# Altium PCB Battery_guage.PcbDoc
Units mil, origin at the board's own origin, x right, y up, seen from the top; angles counter-clockwise.
Board outline 3375 x 1835 mil, 2 copper layers (Top Layer, Bottom Layer); 41 components, 32 nets, 143 pads, 25 vias.
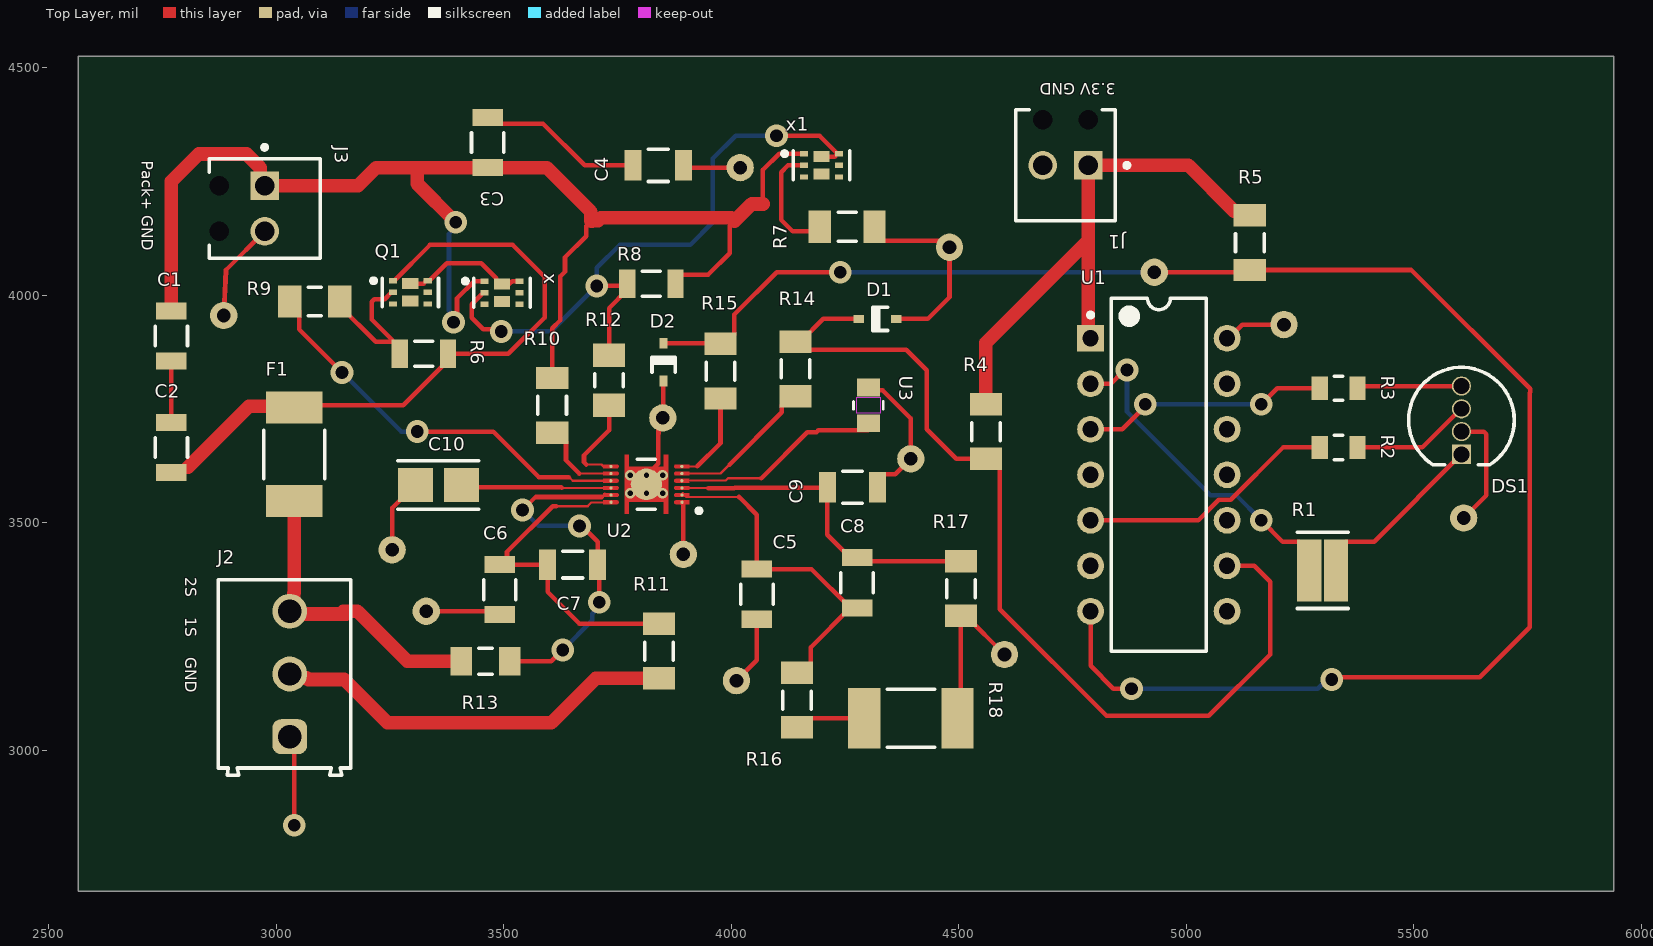
[diagram p0: Top Layer view]
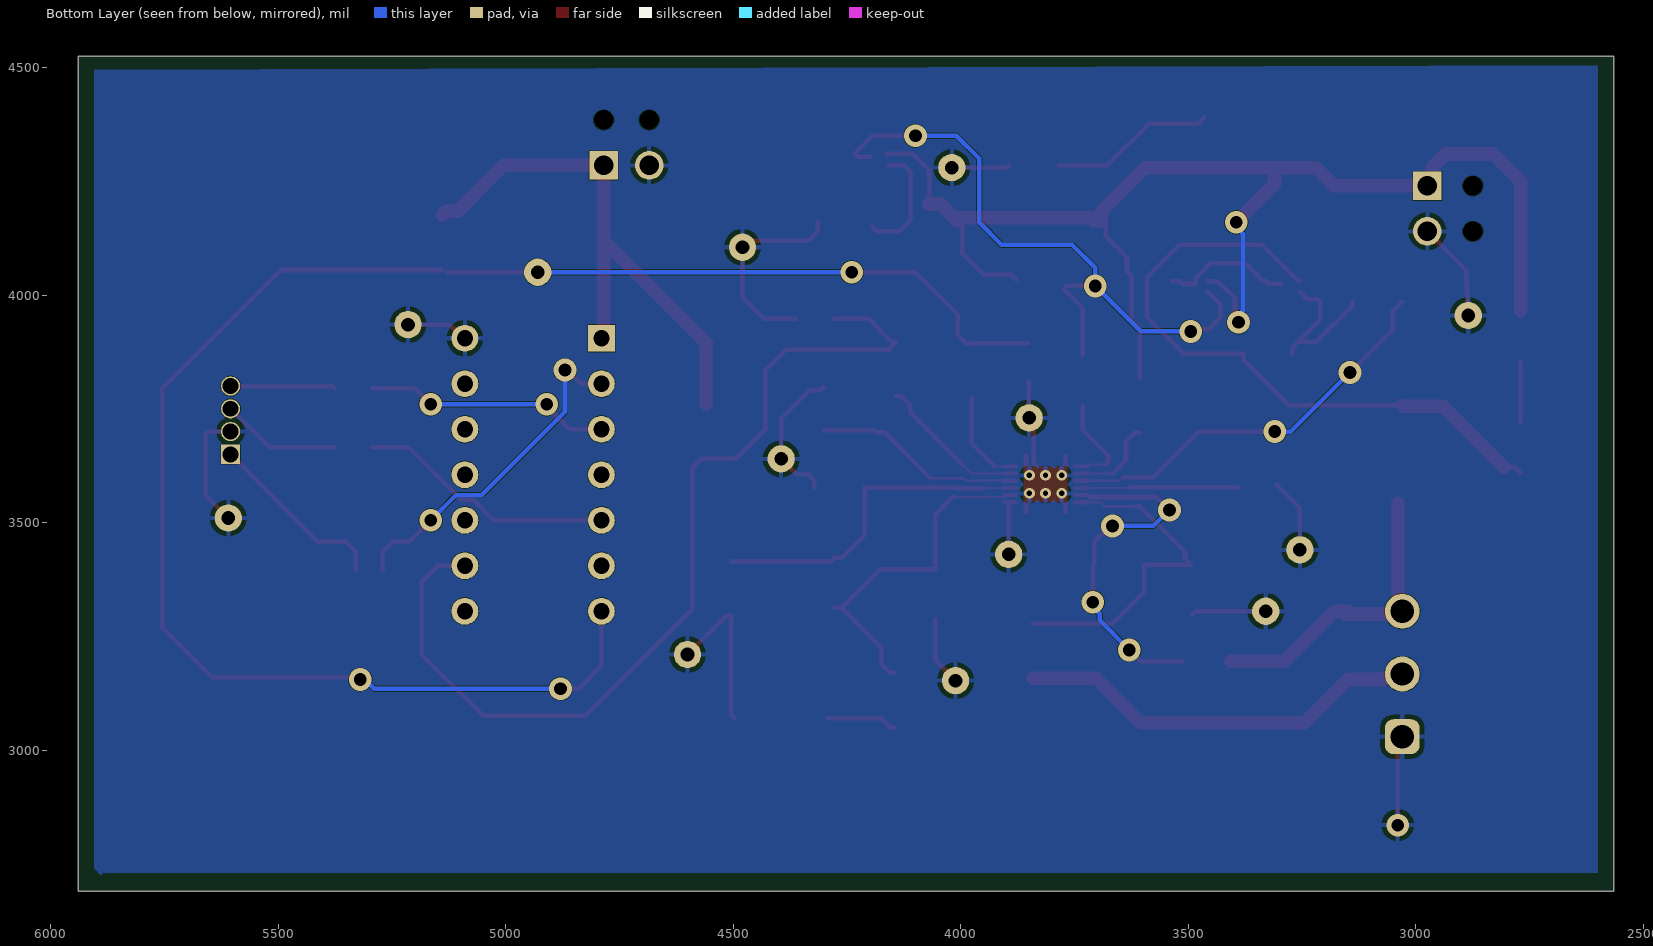
[diagram p1: Bottom Layer view, seen from below]
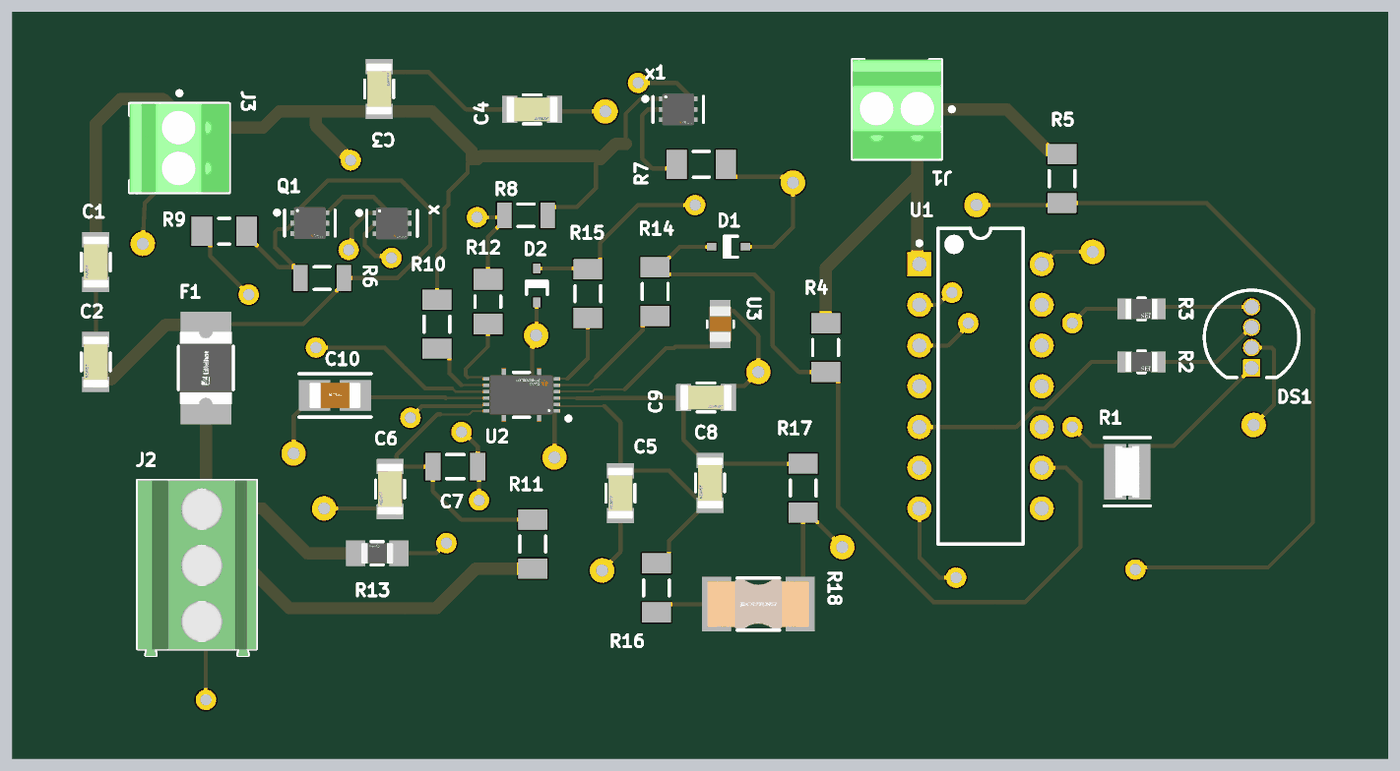
[diagram p2: 3D render of the assembled board from above, using the file's embedded part models]

## Layer stack, top to bottom
Top Solder: solder mask 0.4, Solder Resist, Dk 3.5
Top Layer: signal copper 1.4
Dielectric 1: dielectric 12.6, FR-4, Dk 4.8
Bottom Layer: signal copper 1.4
Bottom Solder: solder mask 0.4, Solder Resist, Dk 3.5

## Board outline
2565,2690 2565,4525 5940,4525 5940,2690

## Design rules (kind name [scope] priority, off if disabled: settings)
Clearance [All] p1: gap=1 ignorepadtopadclearanceinfootprint=FALSE
MinimumSolderMaskSliver [All] p1: minsoldermaskwidth=2
PolygonConnect [All] p1: connectstyle=Relief reliefconductorwidth=10 reliefentries=4 polygonreliefangle="90 Angle" airgapwidth=10
RoutingVias [All] p1: holewidth=28 width=50 viastyle="Through Hole" minholewidth=28 minwidth=50 maxholewidth=28 maxwidth=50
SolderMaskExpansion [All] p1: expansion=4 istentingtop=FALSE
SupplyNets "Schematic Supply Nets_1" [InNet('3.3V')] p1: voltage=0.000
SupplyNets "Schematic Supply Nets" [InNet('GND')] p2: voltage=0.000
Width [All] p1: maxlimit=35 minlimit=3 preferedwidth=10
29 further rules are at their usual default settings.

## Components (designator, comment, footprint, x,y, rotation, side; value= is the part's Value field where it differs from the comment)
C1 "C1206C104KARACTU" FP-C1206C-EB-MFG 2770,3910 r90 top value="0.10 μF"
C2 "C1206C104KARACTU" FP-C1206C-EB-MFG 2770,3664.88 r90 top value="0.10 μF"
C3 "C1206C104KARACTU" FP-C1206C-EB-MFG 3465,4335.12 r270 top value="0.10 μF"
C4 "C1206C104KARACTU" FP-C1206C-EB-MFG 3840,4285 r180 top value="0.10 μF"
C5 "C1206C104KARACTU" FP-C1206C-EB-MFG 4056.73,3342.6 r90 top value="0.10 μF"
C6 "C1206C104KARACTU" FP-C1206C-EB-MFG 3491.73,3352.6 r90 top value="0.10 μF"
C7 "CAP 1uF 10V 1206(3216)" CAPC1206(3216)130_L 3651.73,3407.6 r180 top value=1uF
C8 "C1206C104KARACTU" FP-C1206C-EB-MFG 4276.73,3367.6 r90 top value="0.10 μF"
C9 "C1206C104KARACTU" FP-C1206C-EB-MFG 4266.73,3577.6 r180 top value="0.10 μF"
C10 "C3216X7R1H225K160AB" FP-C3216-160-0_2-IPC_A 3356.73,3582.6 r0 top
D1 "BZT52C5V6S-7-F" DIOD-SOD323-2_V 4321.73,3947.6 r180 top
D2 "BZT52C5V6S-7-F" DIOD-SOD323-2_V 3851.73,3852.6 r90 top
DS1 "WP154A4SUREQBFZGC" KING-WP154A4SUREQBFZGC_V 5605,3725 r180 top
F1 "1812L075/33DR" FP-1812L075-33DR-MFG 3040,3650 r90 top
J1 "1725656" PHOE-1725656-2 4735,4285 r180 top
J2 "691214110003" 691214110003 3018.19,3167.2 r90 top
J3 "1725656" PHOE-1725656-2 2975,4190 r270 top
Q1 "CSD87502Q2" FP-DQK0006B-MFG 3295,4005.79 r0 top
R1 "LTR18EZPF1500" FP-LTR18-IPC_A 5300,3395 r0 top
R2 "RMCF0805JT47R0" FP-RMCF0805-MFG 5335,3665 r0 top
R3 "RMCF0805JT47R0" FP-RMCF0805-MFG 5335,3795 r0 top
R4 "RC1206FR-0710KL" RESC3116X65X40ML10T20 4560,3700 r90 top
R5 "RC1206FR-0710KL" RESC3116X65X40ML10T20 5140,4115 r270 top
R6 "CRCW120610M0JNEA" RESC3216X60X45LL10T20 3325,3870.63 r0 top
R7 "RC1206FR-0710KL" RESC3116X65X40ML10T20 4255,4150 r180 top
R8 "CRCW120610M0JNEA" RESC3216X60X45LL10T20 3825,4025 r0 top
R9 "RG3216P-5101-B-T1" RESC3216X50X50NL20T25 3085,3985.63 r0 top
R10 "RC1206FR-0710RL" RESC3116X65X40ML10T20 3606.73,3757.6 r90 top
R11 "RC1206FR-07100RL" RESC3116X65X40ML10T20 3841.73,3217.6 r90 top
R12 "RG3216P-5101-B-T1" RESC3216X50X50NL20T25 3731.73,3812.6 r90 top
R13 "RLT1220-F-5R00-FNH" FP-RLT1220-F-MFG 3460,3195 r180 top
R14 "RC1206FR-07100RL" RESC3116X65X40ML10T20 4141.73,3837.6 r270 top
R15 "RC1206FR-07100RL" RESC3116X65X40ML10T20 3976.73,3832.6 r270 top
R16 "RC1206FR-07100RL" RESC3116X65X40ML10T20 4145,3110 r90 top
R17 "RC1206FR-07100RL" RESC3116X65X40ML10T20 4505,3355 r90 top
R18 "CSS2H-2512K-3L00F" FP-CSS2H-2512K-3L00F-MFG 4395,3070 r0 top
U1 "ATtiny44-20PU" 14P3 4940,3605 r0 top
U2 "BQ28Z610DRZR" FP-DRZ0012A-MFG 3813.98,3583.98 r90 top
U3 "NTCS0805E3103FHT" NTCS0805_VIS 4301.73,3757.6 r270 top
x "CSD87502Q2" FP-DQK0006B-MFG 3496.61,4005 r0 top
x1 "CSD87502Q2" FP-DQK0006B-MFG 4198.39,4285 r0 top

## Footprints (in the part's own frame and the unit in brackets; to place one, negate y for a bottom-side part, rotate by r counter-clockwise, add the part's x,y. Pads: shape width x height; smd on the part's side, far side on the other; paste and mask are expansions set on the pad)
14P3 [mm] "DIP, 14-Pin, Row Spacing 7.62 mm, Pitch 2.54 mm"
  rect 1.5x1.5 hole 0.9: 1(-3.81,7.62)
  round 1.5 hole 0.9: 2(-3.81,5.08) 3(-3.81,2.54) 4(-3.81,0) 5(-3.81,-2.54) 6(-3.81,-5.08) 7(-3.81,-7.62) 8(3.81,-7.62) 9(3.81,-5.08) 10(3.81,-2.54) 11(3.81,0) 12(3.81,2.54) 13(3.81,5.08) 14(3.81,7.62)
  silkscreen extent -3.93,-9.85 2.65,9.85, body extent -3.55,-9.85 3.55,9.85, height 5.33
691214110003 [mm] "3.50 mm Horizontal Entry Modular, 3p"
  rrect50% 1.95x1.95 hole 1.3: 1(-3.5,-0.3)
  round 1.95 hole 1.3: 2(0,-0.3) 3(3.5,-0.3)
  silkscreen extent -5.65,-3.7 5.25,3.7, body extent -5.7,-3.7 5.25,3.7, height 8.55
CAPC1206(3216)130_L [mm] "Chip Capacitor, Body 3.2x1.6mm, Height 1.3mm, IPC High Density"
  rect 0.95x1.7 smd: 1(-1.4,0) 2(1.4,0)
  silkscreen extent -0.55,-0.75 0.55,0.75, body extent -1.7,-0.9 1.7,0.9, height 1.3
DIOD-SOD323-2_V [mm] "SOD-323, 2-Leads, Body 1.7x1.3mm, Lead Span 2.5mm"
  rect 0.59x0.45 smd: 1(-1.055,0) 2(1.055,0)
  silkscreen extent -0.56,-0.65 0.26,0.65, body extent -0.85,-0.65 0.85,0.65, height 1.2
FP-1812L075-33DR-MFG [mm]
  rect 1.78x3.15 smd paste+0 mask+0: 1(-2.615,0) 2(2.615,0)
  silkscreen extent -1.35,-1.71 1.35,1.71, body extent -3.6,-1.81 3.6,1.81, height 0.25
FP-C1206C-EB-MFG [mm]
  rect 0.95x1.7 smd paste+0 mask+0: 1(-1.4,0) 2(1.4,0)
  silkscreen extent -0.55,-0.9 0.55,0.9, body extent -2,-1 2,1, height 0.25
FP-C3216-160-0_2-IPC_A [mil]
  rect 76.93x75.05 smd paste+0 mask+0: 1(-50.24,0) 2(50.24,0)
  silkscreen extent -89,-53 89,53, body extent -108,-57 108,57, height 10
FP-CSS2H-2512K-3L00F-MFG [mm]
  rect 1.8x3.4 smd paste+0 mask+0: 1(-2.6,0) 2(2.6,0)
  silkscreen extent -1.33,-1.63 1.33,1.63, body extent -3.6,-1.8 3.6,1.8, height 0.25
FP-DQK0006B-MFG [mm]
  rect 0.45x0.3 smd paste+0 mask+0: 1(-0.975,0.65) 2(-0.975,0) 3(-0.975,-0.65) 4(0.975,-0.65) 5(0.975,0) 6(0.975,0.65)
  rect 0.9x0.625 smd paste-1000 mask+0: 7(0,0.488) 8(0,-0.488)
  silkscreen extent -2.17,-0.8 1.58,0.8, body extent -1.3,-1.15 1.3,1.15, height 0.25
FP-DRZ0012A-MFG [mm]
  round 0.18 smd paste-1000 mask+0: 1(-1,-1.985) 2(-0.6,-1.985) 3(-0.2,-1.985) 4(0.2,-1.975) 5(0.6,-1.975) 6(1,-1.975) 7(1,1.985) 8(0.6,1.985) 9(0.2,1.985) 10(-0.2,1.975) 11(-0.6,1.975) 12(-1,1.975)
  round 1.755 smd paste-1000 mask+0: 13(0,0)
  Top Layer region: -1.65,1.225 1.65,1.225 1.65,0.975 0.975,0.975 0.975,-0.975 1.65,-0.975 1.65,-1.225 -1.65,-1.225 -1.65,-0.975 -0.975,-0.975 -0.975,0.975 -1.65,0.975 -1.65,1.225
  Top Layer region: -0.7,-2.4 -0.7,-1.65 -0.692,-1.612 -0.671,-1.579 -0.638,-1.558 -0.6,-1.55 -0.6,-1.55 -0.562,-1.558 -0.529,-1.579 -0.508,-1.612 -0.5,-1.65 -0.5,-1.65 -0.5,-2.4
  Top Layer region: -0.3,-2.4 -0.3,-1.65 -0.292,-1.612 -0.271,-1.579 -0.238,-1.558 -0.2,-1.55 -0.2,-1.55 -0.162,-1.558 -0.129,-1.579 -0.108,-1.612 -0.1,-1.65 -0.1,-1.65 -0.1,-2.4
  Top Layer region: 0.1,-2.4 0.1,-1.65 0.108,-1.612 0.129,-1.579 0.162,-1.558 0.2,-1.55 0.2,-1.55 0.238,-1.558 0.271,-1.579 0.292,-1.612 0.3,-1.65 0.3,-1.65 0.3,-2.4
  Top Layer region: 0.5,-2.4 0.5,-1.65 0.508,-1.612 0.529,-1.579 0.562,-1.558 0.6,-1.55 0.6,-1.55 0.638,-1.558 0.671,-1.579 0.692,-1.612 0.7,-1.65 0.7,-1.65 0.7,-2.4
  Top Layer region: 0.9,-2.4 0.9,-1.65 0.908,-1.612 0.929,-1.579 0.962,-1.558 1,-1.55 1,-1.55 1.038,-1.558 1.071,-1.579 1.092,-1.612 1.1,-1.65 1.1,-1.65 1.1,-2.4
  Top Layer region: 1.1,2.4 1.1,1.65 1.087,1.6 1.05,1.563 1,1.55 1,1.55 0.962,1.558 0.929,1.579 0.908,1.612 0.9,1.65 0.9,1.65 0.9,2.4
  Top Layer region: 0.7,2.4 0.7,1.65 0.687,1.6 0.65,1.563 0.6,1.55 0.6,1.55 0.562,1.558 0.529,1.579 0.508,1.612 0.5,1.65 0.5,1.65 0.5,2.4
  Top Layer region: 0.3,2.4 0.3,1.65 0.287,1.6 0.25,1.563 0.2,1.55 0.2,1.55 0.162,1.558 0.129,1.579 0.108,1.612 0.1,1.65 0.1,1.65 0.1,2.4
  Top Layer region: -0.1,2.4 -0.1,1.65 -0.113,1.6 -0.15,1.563 -0.2,1.55 -0.2,1.55 -0.238,1.558 -0.271,1.579 -0.292,1.612 -0.3,1.65 -0.3,1.65 -0.3,2.4
  Top Layer region: -0.5,2.4 -0.5,1.65 -0.513,1.6 -0.55,1.563 -0.6,1.55 -0.6,1.55 -0.638,1.558 -0.671,1.579 -0.692,1.612 -0.7,1.65 -0.7,1.65 -0.7,2.4
  Top Layer region: -0.9,2.4 -0.9,1.65 -0.913,1.6 -0.95,1.563 -1,1.55 -1,1.55 -1.038,1.558 -1.071,1.579 -1.092,1.612 -1.1,1.65 -1.1,1.65 -1.1,2.4
  Top Layer region: -1.1,-2.4 -1.1,-1.65 -1.092,-1.612 -1.071,-1.579 -1.038,-1.558 -1,-1.55 -1,-1.55 -0.962,-1.558 -0.929,-1.579 -0.908,-1.612 -0.9,-1.65 -0.9,-1.65 -0.9,-2.4
  silkscreen extent -1.6,-3.05 1.4,0.5, body extent -1.75,-2.5 1.75,2.5, height 0.25
FP-LTR18-IPC_A [mil]
  rect 53.31x136.15 smd paste+0 mask+0: 1(-29.61,0) 2(29.61,0)
  silkscreen extent -56,-84 56,84, body extent -76,-88 76,88, height 10
FP-RLT1220-F-MFG [mm]
  rect 1.2x1.6 smd paste+0 mask+0: 1(-1.35,0) 2(1.35,0)
  silkscreen extent -0.38,-0.72 0.38,0.72, body extent -2.05,-0.9 2.05,0.9, height 0.25
FP-RMCF0805-MFG [mm]
  rect 0.9x1.3 smd paste+0 mask+0: 1(-1.05,0) 2(1.05,0)
  silkscreen extent -0.23,-0.67 0.23,0.67, body extent -1.6,-0.77 1.6,0.77, height 0.25
KING-WP154A4SUREQBFZGC_V [mm] "THD, 4-Leads, Dia 5.9mm, Pitch 1.27mm"
  rect 1.07x1.07 hole 0.889 paste-2539.97: 1(0,1.905)
  round 1.07 hole 0.889 paste-2539.97: 2(0,0.635) 3(0,-0.635) 4(0,-1.905)
  silkscreen extent -2.95,-2.95 2.95,2.5
NTCS0805_VIS [mm]
  rect 1x1.3 smd paste+0 mask+0: 1(-1,0) 2(1,0)
  Top Layer keep-out region: -0.449,-0.648 -0.449,0.648 0.449,0.648 0.449,-0.648
  silkscreen extent -0.22,-0.83 0.22,0.83, body extent -1.1,-0.7 1.1,0.7, height 0.94
PHOE-1725656-2 [mm] "Connector, 2-Leads, Body 6.2x5.4mm, Pitch 2.54mm"
  rect 1.6x1.6 hole 1.1: 1(-1.27,0)
  round 1.6 hole 1.1: 2(1.27,0)
  round 0 hole 1.1 unplated: MH1(-1.27,-2.54) MH2(1.27,-2.54)
  silkscreen extent -3.55,-3.1 2.77,3.1, body extent -2.77,-3.1 2.77,3.1, height 9
RESC3116X65X40ML10T20 [mm] "Chip Resistor, 2-Leads, Body 3.10x1.60mm, IPC Low Density"
  rect 1.25x1.8 smd: 1(-1.525,0) 2(1.525,0)
  silkscreen extent -0.5,-0.8 0.5,0.8, body extent -1.6,-0.85 1.6,0.85, height 0.65
RESC3216X50X50NL20T25 [mm] "Chip Resistor, 2-Leads, Body 3.20x1.60mm, IPC Medium Density"
  rect 1.3x1.8 smd: 1(-1.4,0) 2(1.4,0)
  silkscreen extent -0.35,-0.8 0.35,0.8, body extent -1.7,-0.9 1.7,0.9, height 0.5
RESC3216X60X45LL10T20 [mm] "Chip Resistor, 2-Leads, Body 3.20x1.60mm, IPC High Density"
  rect 0.9x1.6 smd: 1(-1.35,0) 2(1.35,0)
  silkscreen extent -0.5,-0.7 0.5,0.7, body extent -1.65,-0.85 1.65,0.85, height 0.6

## Part data
C1 C2 C3 C4 C5 C6 C8 C9: library part CMP-1037-04229-2, "CAP CER 0.1UF 250V X7R 1206", Capacitance="0.10 μF", Manufacturer=KEMET, Package=C1206C-EB, Temperature="-55°C to +150°C", Temperature Characteristic=X7R, Temperature Coefficient=15%, Temperature Range High=+150°C, Temperature Range Low=-55°C, Tolerance=0.1, Voltage Rating="250 V", Automotive=Yes, Automotive Grade="Grade 0", Category=Cap, ComponentLink2Description=Datasheet, ComponentLink2URL=https://content.kemet.com/datasheets/KEM_C1007_X8R_ULTRA_150C_SMD.pdf, Device Class L1="Passive Components", Device Class L2=Capacitors, Device Class L3="Ceramic Capacitors", Digikey Description="CAP CER 0.1UF 250V X7R 1206", Height=0.88mm, Ipc Land Pattern Name=CAPC320160X78, Lead Free=Yes, Manufacturer Part Number=C1206C104KARACTU, Material=Ceramic, Mouser Description="Multilayer Ceramic Capacitors MLCC - SMD/SMT 250volts 0.1uF X7R 10%", Octopart=https://octopart.com/c1206c104karactu-kemet-193627, RoHS=TRUE
C7: library part CMP-1037-04676-1, "CAP 1uF 10V ±20% 1206 (3216 Metric) Thickness 1.3mm SMD", Case-EIA=1206, Case-Metric=3216, Rated Voltage="10 V", Tolerance=Â±20%, Max Thickness="1.3 mm", Technology=SMT
C10: library part CMP-08246-002981-1, "Multilayer Ceramic Capacitors 2.2uF ±10% 50V X7R SMD 1206", Capacitance=2.2uF, Case Code (Imperial)=1206, Case Code (Metric)=3216, Dielectric=X7R, Dielectric Material=Ceramic, Max Operating Temperature=125°C, Min Operating Temperature=-55°C, Package Quantity=1, Tolerance=10%, Voltage Rating=50V, Case/Package=1206, Construction=Flat, Depth=1.6mm, Height=1.6mm, Lead Free="Lead Free", Length=3.2mm, Mount="Surface Mount", Number of Pins=2, Packaging="Tape and Reel", Resistor Type=Ceramic, RoHS Compliant=Yes, Series=C, Termination=SMD/SMT, Thickness=0.075inch, Voltage Rating (DC)=50V, Weight=0.000571oz, Width=0.063inch
D1 D2: library part CMP-2000-05977-1, "Surface Mount Zener Diode, 5.6 V, -65 to 150 degC, 2-Pin SOD323, RoHS, Tape and Reel", Ir - Reverse Current=3uA, Manufacturer=DiodesIncorporated, Maximum Operating Temperature=+150C, Minimum Operating Temperature=-65C, Package / Case=SOD-323, Package Description="2-Pin Surface Mount Device, Body 1.7 x 1.3 mm", Package Reference=SOD323-2, Pd - Power Dissipation=200mW, Voltage Temperature Coefficient=0.25mV/C, Voltage Tolerance=5%, Vz - Zener Voltage=5.6V, Zener Current=5mA, Brand=DiodesIncorporated, Configuration=Single, Datasheet URL=http://www.diodes.com/_files/datasheets/ds30093.pdf, Datasheet Version="Rev. 18-2, 05/2012", Factory Pack Quantity=3000, Height=1mm, Length=1.8mm, Manufacturer URL=http://www.diodes.com/, Mounting Style=SMD/SMT, Mounting Technology=SurfaceMount, Package URL=http://www.vishay.com/docs/71192/71192.pdf, Packaging=Reel, Product Category=ZenerDiodes, RoHS=True, Series=BZT52C5V6, Termination Style=SMD/SMT, Unit Weight=0.000173oz, Width=1.4mm, Zz - Zener Impedance=40Ohms
DS1: library part CMP-2000-07415-1, "Full Color LED Lamp, Dominant Wavelength RGB 630 / 525 / 465 nm, -40 to 85 degC, 4-Pin THD, RoHS", Color=Red,Green,Blue(RGB), Current - Test=20mA, Manufacturer=Kingbright, Millicandela Rating=1300mcdRed,1700mcdGreen,900mcdBlue, Package / Case=Radial-4Leads, Package Description="4-Pin Through Hole LED, Dia 5.9 mm, Pitch 1.27 mm", Standard Package=500, Voltage - Forward (Vf) (Typ)=1.9VRed,3.3VGreen,3.3VBlue, 3D Model="WP154A4SUREQBFZGW.sldprt /  / WP154A4SUREQBFZGW.pro /  / WP154A4SUREQBFZGW.igs /  / WP154A4SUREQBFZGW.stp", Category=Optoelectronics, Datasheet URL=https://www.kingbrightusa.com/images/catalog/spec/WP154A4SUREQBFZGC.pdf, Datasheet Version="Rev. 5A, 08/2014", Family=LEDIndication-Discrete, Height=8.60mm, Lens Style/Size=RoundwithDomedTop,5mm,T-13/4, Lens Type=Clear, Manufacturer URL=http://www.kingbright.com/, Mounting Technology=ThroughHole, Mounting Type=ThroughHole, Online Catalog=5mm,T-13/4(RGB)RoundwithDomedTopLEDLamp, Other Names="754-1615 / WP154A4SUREQBFZGC-ND", Package Reference=WP154A4SUREQBFZGC, Packaging=Bulk, Viewing Angle=50°, Wavelength - Dominant=630nm,525nm,465nm, Wavelength - Peak=645nm,515nm,460nm
F1: library part CMP-08606-000075-1, "PTC RESET FUSE 33V 750MA 1812", Case Code (Imperial)=1812, Case Code (Metric)=4532, Current Rating=20A, Hold Current=750mA, Max Operating Temperature=85°C, Max Power Dissipation=800mW, Min Operating Temperature=-40°C, Operating Supply Voltage=33V, Package Quantity=1500, Resistance=400mR, Trip Current=1.5A, Approvals=TUV, Case/Package=1812, Height=1.55mm, Lead Free="Lead Free", Length=4.73mm, Max Current Rating=20A, Mount="Surface Mount", Packaging="Tape and Reel", Power Dissipation=800mW, REACH SVHC="No SVHC", RoHS Compliant=Yes, Series=1812L, Terminal Material=Copper, Termination=SMD/SMT, Time to Trip=200ms, Voltage Rating=33V, Voltage Rating (DC)=33V, Width=3.41mm, Working Voltage=33V
J1 J3: library part CMP-2000-05299-1, "Male Header, Pitch 2.54 mm, 1 x 2 Position, Height 9 mm, Tail Length 3.5 mm", Colour=Green, Manufacturer="Phoenix Contact", Content=250pc(s), Datasheet URL=http://datasheet.octopart.com/1725656-Phoenix-Contact-datasheet-5302866.pdf, Datasheet Version=Apr-08, Industrial packaging=Yes, Manufacturer part No.=1725656, Manufacturer URL=http://www.phoenixcontact.com/, Number of contacts=2, Pitch=2.54mm, Type=MPT0,5/2-2,54
J2: library part CMP-1502-02466-2, Color="Blue, Green", Current=10A, Max Operating Temperature=105°C, Min Operating Temperature=-40°C, Voltage=300V, Contact Material=Brass, Contact Plating="Brass, Tin", Current Rating=10A, Height=12.2mm, Housing Material=Nylon, Lead Pitch=3.5mm, Length=7.4mm, Mount="Through Hole", NexarPartId=18818289, Number of contacts=3, Number of Levels=1, Number of Pins=3, Number of Positions Per Level=3, Packaging=Box, Pitch=3.5052mm, Plating="Brass, Steel", REACH SVHC=Unknown, RoHS=Compliant, Stripping Length=-6mm, Termination=Screw, Voltage Rating=300V, Width=10.9mm, Wire Gauge (Max)=24AWG, Wire Gauge (Min)=16AWG, Wire/Cable Gauge=24AWG
Q1 x x1: library part CMP-04962-000076-1, "MOSFET 2N-CH 30V 5A 6WSON", Continuous Drain Current (ID)=5A, Drain to Source Voltage (Vdss)=30V, Input Capacitance=353pF, Max Operating Temperature=150°C, Max Power Dissipation=2.3W, Min Operating Temperature=-55°C, Element Configuration=Dual, FET Type="2 N-Channel", Lead Free="Lead Free", Mount="Surface Mount", Packaging="Tape and Reel", Rds On Max=32.4mR, RoHS Compliant=Yes
R1: library part CMP-08839-001220-1, "High power chip resistors wide terminal type 150Ω 1% 0.75W 0612", Case Code (Imperial)=1206, Case Code (Metric)=3216, Max Operating Temperature=155°C, Max Power Dissipation=750mW, Min Operating Temperature=-55°C, Package Quantity=1, Resistance=150R, Resistor Type="Thick Film", Temperature Coefficient=100ppm/°C, Tolerance=1%, Case/Package=1206, Features="Automotive AEC-Q200", Height=0.026inch, Length=0.063inch, Number of Terminations=2, Packaging="Cut Tape", Series=LTR, Width=0.126inch
R2 R3: library part CMP-26527-000048-1, "47Ω ±5% 0.125W 0805 Thick Film Chip Resistor AEC-Q200 compliant", Case Code (Imperial)=0805, Case Code (Metric)=2012, Max Operating Temperature=155°C, Max Power Dissipation=125mW, Min Operating Temperature=-55°C, Resistance=47R, Resistor Type="Thick Film", Temperature Coefficient=100ppm/°C, Tolerance=5%, Case/Package=0805, Contact Plating=Tin, Features="Automotive AEC-Q200", Height=0.026inch, Lead Free="Lead Free", Length=0.079inch, Mount="Surface Mount", Number of Terminations=2, Packaging="Tape and Reel", Power Rating=125mW, Radiation Hardening=No, RoHS Compliant=Yes, Series=RMCF, Size Code=0805, Width=0.049inch
R4 R5 R7: library part CMP-1014-00623-2, "Chip Resistor, 10 KOhm, +/- 1%, 0.25 W, -55 to 155 degC, 1206 (3216 Metric), RoHS, Tape and Reel", Case Code (Imperial)=1206, Case Code (Metric)=3216, Manufacturer=Yageo, Max Operating Temperature=155degC, Min Operating Temperature=-55degC, Package Description="2-Pin Surface Mount Device, Body 3.1 x 1.6 mm", Package Quantity=5000, Package Reference=1206.0, Power Rating=250mW, Resistance=10KOhm, Temperature Coefficient=100ppm/degreesC, Tolerance=1%, Voltage Rating=200V, Case/Package=1206, Composition=ThickFilm, Datasheet URL=http://www.yageo.com/NewPortal/yageodocoutput?fileName=/pdf/R-Chip/PYu-RC_Group_51_RoHS_L_5.pdf, Datasheet Version="Rev. 5, 10/2016", Depth=1.6mm, Height=0.55mm, Lead Free=LeadFree, Length=3.1mm, Manufacturer URL=http://www.yageo.com/, Military Standard=Not, Packaging=TapeandReel, REACH SVHC=Unknown, RoHSCompliant=true, Termination=SMD/SMT, Width=1.6mm
R6 R8: library part CMP-2003-04814-1, Manufacturer="Vishay Dale", Part Number=CRCW120610M0JNEA
R9 R12: library part CMP-2003-02608-1, Manufacturer=Susumu, Part Number=RG3216P-5101-B-T1
R10: library part CMP-2100-03677-1, "Chip Resistor, 10 Ohm, +/- 1%, 0.25 W, -55 to 155 degC, 1206 (3216 Metric), RoHS, Tape and Reel", Case Code (Imperial)=1206, Case Code (Metric)=3216, Manufacturer=Yageo, Max Operating Temperature=155degC, Max Power Dissipation=250mW, Min Operating Temperature=-55degC, Package Description="2-Pin Surface Mount Device, Body 3.1 x 1.6 mm", Package Quantity=1, Package Reference=1206.0, Resistance=10Ohm, Temperature Coefficient=200ppm/degreesC, Tolerance=1%, Voltage Rating=200V, Case/Package=1206, Composition=ThickFilm, Datasheet URL=http://www.yageo.com/NewPortal/yageodocoutput?fileName=/pdf/R-Chip/PYu-RC_Group_51_RoHS_L_5.pdf, Datasheet Version="Rev. 5, 10/2016", Depth=1.6mm, Height=0.026inch, Lead Free=LeadFree, Length=3.1mm, Manufacturer URL=http://www.yageo.com/, Military Standard=Not, Number of Pins=2, Number of Terminations=2, Packaging=TapeandReel, Power Rating=250mW, REACH SVHC=Unknown, RoHSCompliant=true, Termination=SMD/SMT, Voltage Rating (DC)=200V, Width=0.063inch
R11 R14 R15 R16 R17: library part CMP-2100-03675-1, "Chip Resistor, 100 Ohm, +/- 1%, 0.25 W, -55 to 155 degC, 1206 (3216 Metric), RoHS, Tape and Reel", Case Code (Imperial)=1206, Case Code (Metric)=3216, Manufacturer=Yageo, Max Operating Temperature=155degC, Min Operating Temperature=-55degC, Package Description="2-Pin Surface Mount Device, Body 3.1 x 1.6 mm", Package Quantity=5000, Package Reference=1206.0, Power Rating=250mW, Resistance=100Ohm, Temperature Coefficient=100ppm/degreesC, Tolerance=1%, Voltage Rating=200V, Case/Package=1206, Composition=ThickFilm, Datasheet URL=http://www.yageo.com/NewPortal/yageodocoutput?fileName=/pdf/R-Chip/PYu-RC_Group_51_RoHS_L_5.pdf, Datasheet Version="Rev. 5, 10/2016", Depth=1.6mm, Height=0.55mm, Lead Free=LeadFree, Length=3.1mm, Manufacturer URL=http://www.yageo.com/, Packaging=TapeandReel, REACH SVHC=Unknown, RoHSCompliant=true, Termination=SMD/SMT, Width=1.6mm
R13: library part CMP-89038-000005-1, "RES SMD 5 OHM 1% 1/3W 0805"
R18: library part CMP-00059-73869591-1, "CSS2H-2512K-3L00F Res Metal Strip 2512 0.003 Ohm 1% 4W ±75ppm/C Pad SMD Automotive T/R", Case Code (Imperial)=2512, Case Code (Metric)=6432, Max Operating Temperature=170°C, Max Power Dissipation=4W, Min Operating Temperature=-55°C, Resistance=3mΩ, Temperature Coefficient=50ppm/°C, Tolerance=1%, Case/Package=2512, Composition="Metal Element, Metal Strip", Features="Moisture Resistant", Height=508µm, Length=6.35mm, NexarPartId=73869591, Number of Terminations=2, Packaging="Cut Tape", Power Rating=4W, REACH SVHC="No SVHC", RoHS=Compliant, Schedule B="8533210045, 8533210045", Width=3.048mm
U1: library part CMP-0093-00041-2, "8-bit AVR Microcontroller, 20MHz, 2.7-5.5V, 4KB Flash, 256 Bytes EEPROM, 256 Bytes SRAM, 14-pin PDIP, Industrial Grade (-40°C to 85°C), Pb-Free", Code_JEDEC=MS-001-AA, ComponentLink1Description="Manufacturer URL", ComponentLink1URL=http://www.atmel.com/, ComponentLink2Description="ATtiny24/44/84 Datasheet", ComponentLink2URL=http://www.atmel.com/dyn/resources/prod_documents/doc8006.pdf, ComponentLink3Description="ATtiny24/44/84 Summary", ComponentLink3URL=http://www.atmel.com/dyn/resources/prod_documents/8006S.pdf, DatasheetVersion="revK, Oct-2010", PackageDescription="14-Lead Plastic Dual In-Line, 300 mil/7.62 mm Wide Body (PDIP)", PackageReference=14P3, PackageVersion="revB, Oct-2010", RevisionNote="DatasheetVersion updated. Removed ComponentAvailability note. URLs added."
U2: library part CMP-04911-000059-1, "IC BATT GAS GAUGE LIION 12SON", Max Operating Temperature=85°C, Min Operating Temperature=-40°C, Operating Supply Voltage=26V, Fault Protection="Over Current", Interface=I2C, Lead Free="Lead Free", Mount="Surface Mount", Number of Pins=12, Packaging="Tape and Reel", RoHS Compliant=Yes
U3: library part CMP-02404-000008-2, "THERMISTOR NTC 10KOHM 3940K 0805", Case/Package=0805, Max Operating Temperature=150°C, Min Operating Temperature=-40°C, Power Rating=210mW, Resistance=10kΩ, Tolerance=1%, Accuracy=1%, Depth=1.25mm, Height=950µm, Length=2mm, Mount="Surface Mount", NexarPartId=23920625, Number of Pins=2, Packaging="Tape and Reel", Radiation Hardening=No, RoHS=Compliant, Schedule B="8533400080, 8533400080"

## Free pads (board coordinates)
  round 60 hole 30: 2(4011.73,3152.6) 3(2885,3955) 6(3330,3305) 7(4480,4105) 9(4020,4280) 10(3850,3730) 11(3895,3430) 12(3255,3440) 14(4930,4050) 16(4395,3640) 17(5215,3935) 18(5610,3510) 19(4600.79,3210)

## Via types
v1: diameter 50, hole 28, Top Layer to Bottom Layer, 19 vias
v2: diameter 23.62, hole 11.81, Top Layer to Bottom Layer, 6 vias

## Nets (pads, with @x,y where several pads share a name; then routed paths per layer and width w, separated by ;. In a path a pad name is that pad's centre, name@x,y a point inside that pad or via, vN(x,y) a via of type N, cw(c..) or ccw(c..) an arc to the next point about the centre after c; other vN are vias at no path point)
3.3V: J1.1 R4.2 R5.1 U1.1 | length 1235.8
  Top Layer w10: U1.1@4785,3910 U1.1
  Top Layer w30: R4.2 4560,3895 4785,4120 ; U1.1@4785,3910 4785,4120 ; R5.1 5130.39,4184.65 5105.35,4184.65 5005,4285 J1.1 4785,4120
Blue: R2.1 U1.5 | length 569.9
  Top Layer w10: U1.5 5027.03,3505 5072.03,3550 5097.97,3550 5212.97,3665 R2.1
GND: C4.1 C5.1 C6.1 C9.1 C10.1 D1.1 D2.1 DS1.2 J1.2 J2.1 J3.2 pad.2 pad.3 pad.6 pad.7 pad.9 pad.10 pad.11 pad.12 pad.16 pad.17 pad.18 pad.19 R7.1 R17.1 R18.2 U1.14 U2.1 U2.13 U3.1 | length 2885.8
  Top Layer w10: pad.3 2890,4055 J3.2 ; v1(3040,2835) J2.1@3040,3019.41 ; pad.12 3255,3532.05 3305.55,3582.6 C10.1 ; pad.6 3484.21,3305 C6.1 ; v2(3813.98,3603.66) 3817.67,3603.66 3825.28,3611.28 3825.28,3614.97 3840,3629.69 3840,3695 3840.43,3695.43 3840.43,3720.43 pad.10 3850.87,3730.87 3850.87,3810.2 D2.1 ; 3893.7,3540.67 3895,3539.37 pad.11 ; C4.1 3900.12,4280 pad.9 ; pad.2 4056.73,3197.6 C5.1 ; U3.1 4308.42,3790.29 4333.45,3790.29 4395,3728.73 pad.16 4361.07,3606.07 4335.55,3606.07 4321.85,3592.36 C9.1 ; R7.1@4315.04,4160.83 R7.1 4315.04,4139.17 4334.65,4119.57 4470.43,4119.57 pad.7 4480,3995 4432.6,3947.6 D1.1 ; R18.2 4505,3077.64 R17.1 4515.83,3294.96 pad.19 pad.19@4610,3210 ; U1.14 5092.97,3905 5122.97,3935 pad.17 ; DS1.2 5654.14,3700 5660,3694.14 5660,3560 pad.18
  other v2: 3778.54,3564.29 3813.98,3564.29 3849.41,3564.29 3778.54,3603.66 3849.41,3603.66
Green: R3.1 U1.3 | length 531.8
  Top Layer w10: U1.3 4860,3705 v1@4905,3750 ; v1(5165,3760) 5200,3795 R3.1
  Bottom Layer w10: v1(4910,3760) v1(5165,3760)
NetC1_1: C1.1 C2.2 | length 134.9
  Top Layer w10: C2.2 C1.1
NetC2_1: C2.1 F1.2 Q1.1 R6.2 | length 1453.9
  Top Layer w10: C2.1 2781.81,3621.57 2806.57,3621.57 ; F1.2@3030,3757.95 3279.25,3757.95 3378.15,3856.85 R6.2 3510.63,3870.63 3590,3950 3590,4040 3520,4110 3338.19,4110 3259.57,4031.38 Q1.1
  Top Layer w30: 2806.57,3621.57 2940.57,3755.57 3027.61,3755.57 F1.2@3030,3757.95
NetC3_1: C3.1 C4.2 | length 363.5
  Top Layer w10: C3.1 3478.7,4376.54 3586.56,4376.54 3678.09,4285 C4.2
NetC5_2: C5.2 C8.1 R16.2 U2.2 | length 754.6
  Top Layer w5: 3893.7,3564.29 3901.89,3556.1 4016.48,3556.1
  Top Layer w10: 4016.48,3556.1 4017.98,3556.1 4056.73,3517.35 C5.2 4176.73,3397.72 C8.1@4261.97,3312.48 ; R16.2 4155.83,3170.04 4175.43,3189.65 4175.43,3225.95 C8.1@4261.97,3312.48 ; C8.1 C8.1@4261.97,3312.48
NetC6_2: C6.2 C7.2 R11.2 U2.12 | length 744
  Top Layer w5: 3615.88,3536.1 3684.99,3536.1 3692.8,3543.92 U2.12@3736.22,3543.92
  Top Layer w10: 3615.88,3536.1 3608.07,3536.1 3507.53,3435.56 3507.53,3421.42 3493.83,3407.72 3493.94,3407.6 C7.2 3596.61,3347.72 3666.69,3277.64 R11.2
NetC7_1: C7.1 R13.1 U2.11 | length 788.8
  Top Layer w5: 3715.24,3556.1 3722.47,3563.33
  Top Layer w10: R13.1 3605,3195 v1(3630,3220) ; v1(3541.73,3527.6) 3570.24,3556.1 3715.24,3556.1 ; v1(3666.73,3492.6) 3671.73,3492.6 3706.85,3457.48 C7.1 3710,3404.45 v1(3710,3325)
  Bottom Layer w10: v1(3541.73,3527.6) 3576.73,3492.6 v1(3666.73,3492.6) ; v1(3630,3220) 3695,3285 3695,3299.18 3710,3314.18 v1(3710,3325)
NetC8_2: C8.2 C9.2 R17.2 U2.3 | length 742.9
  Top Layer w5: U2.3 3949.23,3576.1 3950.24,3575.1
  Top Layer w10: 3950.24,3575.1 4007.19,3575.1 4008.2,3576.1 4210.12,3576.1 C9.2 4211.61,3473.07 4261.97,3422.72 C8.2 4284.41,3415.04 R17.2
NetC10_2: C10.2 U2.10 | length 344.9
  Top Layer w5: 3628.23,3576.1 U2.10
  Top Layer w10: C10.2@3391.97,3577.6 3626.73,3577.6 3628.23,3576.1
NetDS1_1: DS1.1 R1.2 | length 405.3
  Top Layer w10: R1.2 5329.61,3436.42 5351.26,3458.08 5413.08,3458.08 DS1.1
NetDS1_3: DS1.3 R2.2 | length 263.9
  Top Layer w10: R2.2 5519,3665 5604,3750 DS1.3
NetDS1_4: DS1.4 R3.2 | length 230.7
  Top Layer w10: R3.2 5381.34,3800 DS1.4
NetQ1_2: Q1.2 R6.1 R9.2 | length 356.6
  Top Layer w10: R9.2 3140.12,3975.79 3218.78,3897.13 R6.1@3259.13,3897.13 ; Q1.2 3253.66,4005.79 3238.61,3990.74 3215.86,3990.74 3210,3984.88 3210,3946.26 R6.1@3259.13,3897.13 ; R6.1 3271.85,3884.41 R6.1@3259.13,3897.13
NetQ1_6: Q1.6 Q1.7 x.6 x.7 | length 288.3
  Top Layer w10: Q1.7 3324.05,4025 3330.43,4031.38 Q1.6 ; Q1.6@3336.34,4031.38 3374.96,4070 3450.83,4070 3483.9,4036.93 3483.9,4031.52 x.7@3491.2,4024.21 ; x.7@3483.39,4024.21 x.7@3491.2,4024.21 ; x.6 3518.82,4030.59 3512.44,4024.21 x.7 x.7@3491.2,4024.21
NetR7_2: R7.2 x1.2 | length 260.7
  Top Layer w10: x1.2 4125,4285 4110,4270 4110,4165 4135,4140 4184.96,4140 R7.2
NetR8_1: R8.1 R12.2 x1.6 x1.7 x.2 | length 1455.4
  Top Layer w10: x.2 3455.28,4005 3430,3979.72 3430,3950 3455,3925 3490,3925 v1(3495,3920) ; v1(3705,4020) 3766.85,4020 3771.85,4015 3771.85,4011.22 3731.73,3971.1 R12.2 ; v1(4100,4350) 4194.41,4350 4233.82,4310.59 4227.44,4304.21 x1.7
  Bottom Layer w10: v1(3495,3920) 3605,3920 v1(3705,4020) 3705,4060 3755,4110 3910,4110 3960,4160 3960,4300 4010,4350 v1(4100,4350)
NetR9_1: R9.1 U2.9 | length 882.8
  Top Layer w5: 3643.6,3600 3651.75,3591.85 U2.9
  Top Layer w10: R9.1 3050.47,3965.04 3050.47,3924.53 v1(3145,3830) ; v1(3310,3700) 3477.6,3700 3577.6,3600 3643.6,3600
  Bottom Layer w10: v1(3145,3830) 3275,3700 v1@3300,3700
NetR10_1: R10.1 U2.8 | length 190.2
  Top Layer w5: 3666.73,3607.6 U2.8
  Top Layer w10: R10.1 3617.56,3697.56 3637.17,3677.95 3637.17,3637.17 3666.73,3607.6
NetR12_1: R12.1 U2.7 | length 194.3
  Top Layer w5: 3681.73,3627.6 3715.24,3627.6 3719.49,3623.35
  Top Layer w10: 3681.73,3627.6 3676.73,3632.6 3676.73,3647.6 3731.73,3702.6 R12.1
NetR14_2: R14.2 U2.5 | length 329.6
  Top Layer w5: U2.5 3976.73,3607.6 3996.73,3627.6
  Top Layer w10: 3996.73,3627.6 4111.3,3742.17 4111.3,3757.95 4130.91,3777.56 R14.2
NetR15_2: R15.2 U2.6 | length 204.5
  Top Layer w5: U2.6 3925.98,3623.35
  Top Layer w10: 3925.98,3623.35 3976.73,3674.1 R15.2
NetR16_1: R16.1 R18.1 | length 155.9
  Top Layer w10: R16.1 4155.83,3049.96 4175.87,3070 R18.1
NetU2_4: U2.4 U3.2 | length 436.4
  Top Layer w5: 3910.92,3592.6 3988.41,3592.6 3993.41,3597.6 4066.73,3597.6
  Top Layer w10: 4066.73,3597.6 4167.68,3698.55 4187.68,3698.55 4191.73,3702.6 U3.2@4301.73,3702.6
Pack+: C1.2 C3.2 J3.1 R8.2 R10.2 x1.1 x.1 | length 3051.6
  Top Layer w10: J3.1@2965,4250 J3.1 ; v1(3390,3940) 3397.65,3947.65 3397.65,3992.65 3435.59,4030.59 x.1 ; R10.2 3606.73,3926.73 3625,3945 3625,4040.93 3635,4050.93 3635,4082.91 3681.65,4129.56 3681.65,4151.65 3692.4,4162.4 ; R8.2@3878.15,4033.78 3889.37,4045 3950,4045 3996.65,4091.65 3996.65,4151.65 4007.4,4162.4 ; 4070,4200 4070,4275 4105.59,4310.59 x1.1 x1.1@4162.95,4310.59
  Top Layer w30: C1.2 2770,4250 2830,4310 2935,4310 2965,4280 J3.1@2965,4250 ; J3.1 3180,4240 3220,4280 3310,4280 ; v1(3395,4160) 3310,4245 3310,4280 ; 3692.4,4162.4 3691.65,4163.15 3691.65,4183.35 3595,4280 C3.2 3310,4280 ; 3694.37,4162.4 3695.12,4163.15 3707.37,4163.15 3714.22,4170 3760,4170 3999.8,4170 4007.4,4162.4 4045,4200 4070,4200
  Bottom Layer w10: v1(3390,3940) 3382.35,3947.65 3382.35,3963.51 3380,3965.86 3380,4134.18 3395,4149.18 v1(3395,4160)
Red: R1.1 U1.2 | length 740.9
  Top Layer w10: U1.2 4835,3805 v1@4860,3830 ; v1(5165,3505) 5211.92,3458.08 5248.74,3458.08 5270.39,3436.42 R1.1
  Bottom Layer w10: v1(4870,3835) 4870,3743.43 5052.96,3560.47 5109.53,3560.47 v1(5165,3505)
SCL: D1.2 R4.1 R14.1 U1.9 | length 2126.8
  Top Layer w10: D1.2 4202.52,3947.6 4152.56,3897.64 R14.1 4159.37,3880 4385,3880 4430,3835 4430,3705 4495.04,3639.96 R4.1 4570.83,3639.96 4590.43,3620.35 4590.43,3309.57 4825,3075 5050,3075 5185,3210 5185,3370 5150,3405 U1.9
SDA: D2.2 pad.14 R5.2 R15.1 U1.7 | length 3753.9
  Top Layer w10: D2.2 3975.24,3894.14 R15.1 3987.56,3892.64 4007.17,3912.25 4007.17,3957.17 4100,4050 v1@4230,4050 ; U1.7 4790,3185 4840,3135 v1(4880,3135) ; pad.14 R5.2@5129.17,4050 ; R5.2 5495.04,4054.96 5755.86,3794.14 5755.86,3785.86 5755,3785 5755,3270 5645,3160 v1@5330,3160
  Bottom Layer w10: v1(4240,4050) pad.14 ; v1@4883.62,3135 5289.18,3135 5309.18,3155 v1(5320,3155)
"V+ (1S)": J2.2 R11.1 | length 898.6
  Top Layer w30: J2.2@3024.95,3160.05 3026.74,3158.26 3067.7,3158.26 3070.96,3155 3150,3155 3245,3060 3605,3060 3702.56,3157.56 R11.1
V+_Battery: F1.1 J2.3 R13.2 | length 659.8
  Top Layer w10: 3147.9,3305 3153.95,3298.95
  Top Layer w30: 3038.95,3344.91 3038.95,3316.53 3056.52,3298.95 3153.95,3298.95 ; 3040,3345.96 F1.1@3040,3542.05 ; 3147.9,3305 3178.63,3305 3288.63,3195 R13.2
pads on no net: J1.MH1 J1.MH2 J3.MH1 J3.MH2 Q1.3 Q1.4 Q1.5 Q1.8 U1.4 U1.6 U1.8 U1.10 U1.11 U1.12 U1.13 x1.3 x1.4 x1.5 x1.8 x.3 x.4 x.5 x.8

## Polygon pours and split planes (outlines as drawn)
GND on Bottom Layer "GND_L02_P000" (solid, pour order 0): 2600,4505 2600,2730 5885,2730 5890,2725 5905,2740 5905,4495

## Silkscreen, mask and mechanical layers (free items; w line width, h text height)
Top Overlay:
  text "3.3V GND" at 4845,4465 h25 r180
  text "Pack+ GND" at 2705,4295 h25 r270
  text "2S    1S    GND" at 2800,3380 h25 r270
Mechanical 1:
  the board outline again, w10